# EAGLE board DBS (EAGLE 9.6.1)
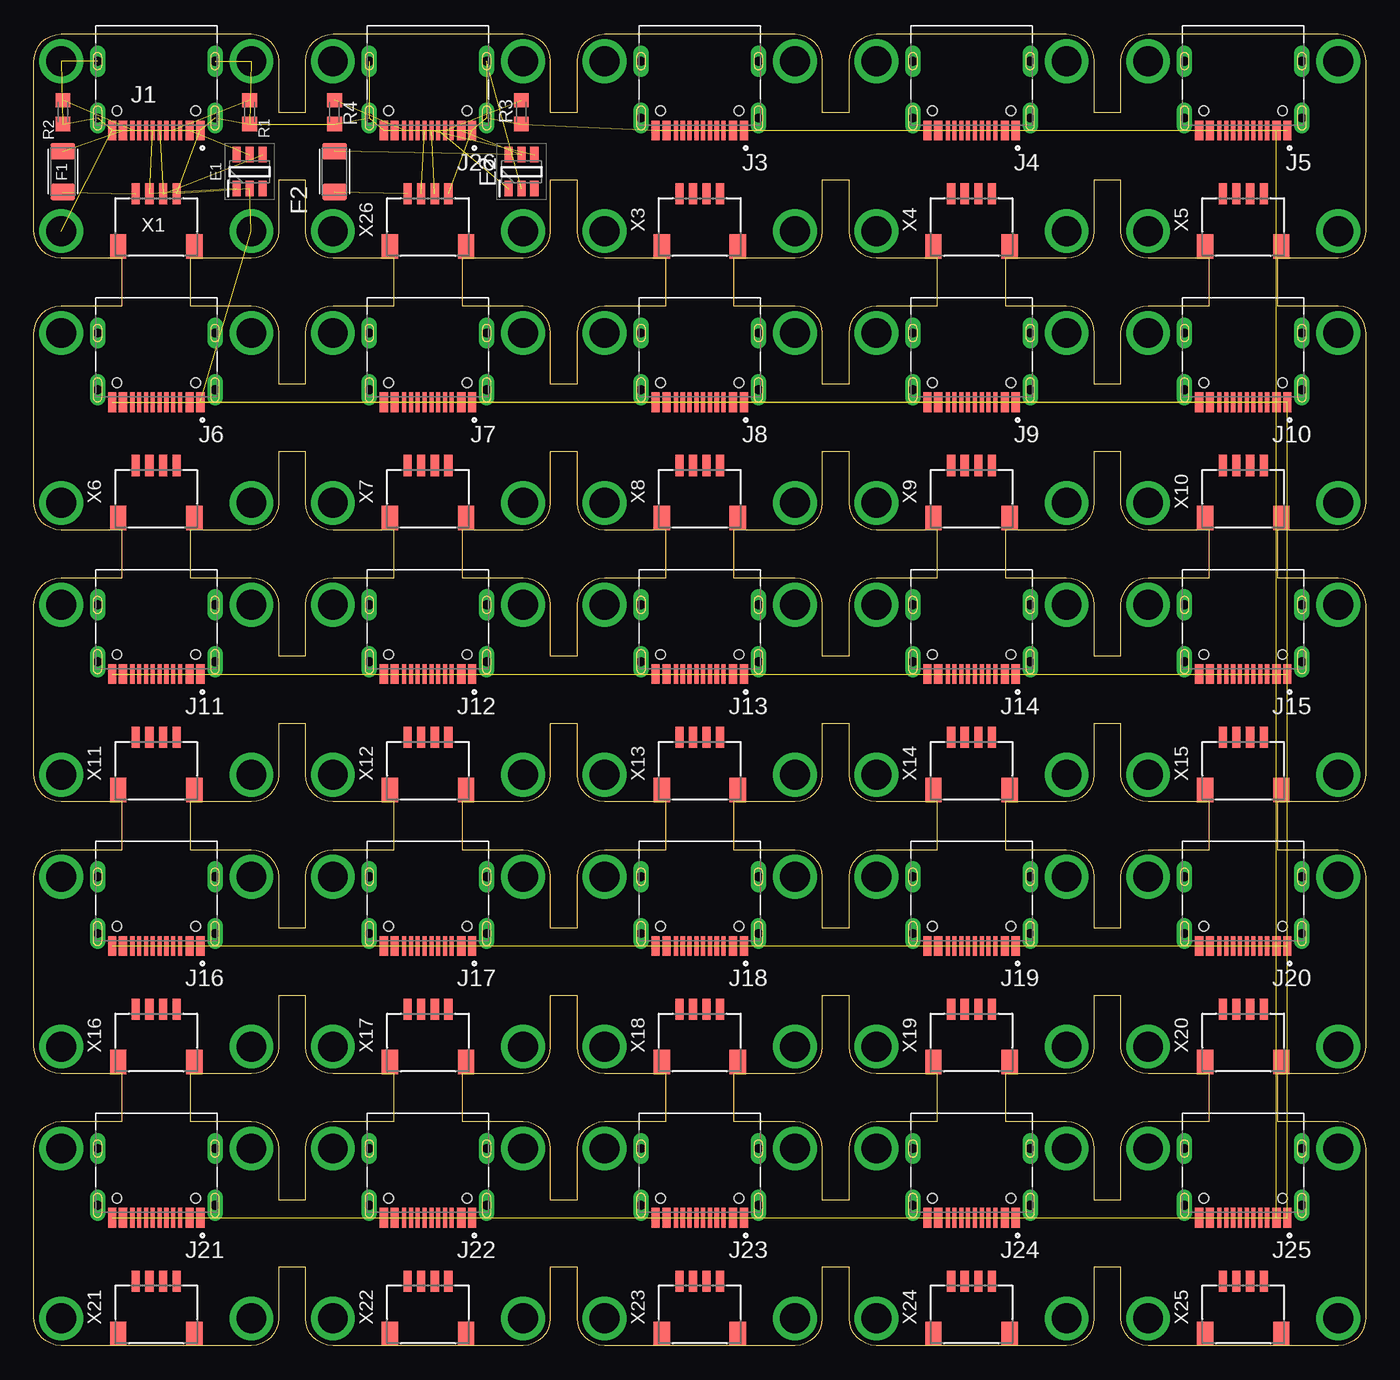
[diagram p0: board, top side]

Size 98 x 96.5 mm. Coordinates in mm from the lower left corner, seen from the top.
Outline: 91.5,16.5 96,16.5 96.4,16.46 96.78,16.34 97.12,16.16 97.41,15.91 97.66,15.62 97.84,15.28 97.96,14.9 98,14.5 98,2 97.96,1.6 97.84,1.22 97.66,0.88 97.41,0.59 97.12,0.34 96.78,0.16 96.4,0.04 96,0 82,0 81.6,0.04 81.22,0.16 80.88,0.34 80.59,0.59 80.34,0.88 80.16,1.22 80.04,1.6 80,2 80,5.75 78,5.75 78,2 77.96,1.6 77.84,1.22 77.66,0.88 77.41,0.59 77.12,0.34 76.78,0.16 76.4,0.04 76,0 62,0 61.6,0.04 61.22,0.16 60.88,0.34 60.59,0.59 60.34,0.88 60.16,1.22 60.04,1.6 60,2 60,5.75 58,5.75 58,2 57.96,1.6 57.84,1.22 57.66,0.88 57.41,0.59 57.12,0.34 56.78,0.16 56.4,0.04 56,0 42,0 41.6,0.04 41.22,0.16 40.88,0.34 40.59,0.59 40.34,0.88 40.16,1.22 40.04,1.6 40,2 40,5.75 38,5.75 38,2 37.96,1.6 37.84,1.22 37.66,0.88 37.41,0.59 37.12,0.34 36.78,0.16 36.4,0.04 36,0 22,0 21.6,0.04 21.22,0.16 20.88,0.34 20.59,0.59 20.34,0.88 20.16,1.22 20.04,1.6 20,2 20,5.75 18,5.75 18,2 17.96,1.6 17.84,1.22 17.66,0.88 17.41,0.59 17.12,0.34 16.78,0.16 16.4,0.04 16,0 2,0 1.6,0.04 1.22,0.16 0.88,0.34 0.59,0.59 0.34,0.88 0.16,1.22 0.04,1.6 0,2 0,14.5 0.04,14.9 0.16,15.28 0.34,15.62 0.59,15.91 0.88,16.16 1.22,16.34 1.6,16.46 2,16.5 6.5,16.5 6.5,20 2,20 1.6,20.04 1.22,20.16 0.88,20.34 0.59,20.59 0.34,20.88 0.16,21.22 0.04,21.6 0,22 0,34.5 0.04,34.9 0.16,35.28 0.34,35.62 0.59,35.91 0.88,36.16 1.22,36.34 1.6,36.46 2,36.5 6.5,36.5 6.5,40 2,40 1.6,40.04 1.22,40.16 0.88,40.34 0.59,40.59 0.34,40.88 0.16,41.22 0.04,41.6 0,42 0,54.5 0.04,54.9 0.16,55.28 0.34,55.62 0.59,55.91 0.88,56.16 1.22,56.34 1.6,56.46 2,56.5 6.5,56.5 6.5,60 2,60 1.6,60.04 1.22,60.16 0.88,60.34 0.59,60.59 0.34,60.88 0.16,61.22 0.04,61.6 0,62 0,74.5 0.04,74.9 0.16,75.28 0.34,75.62 0.59,75.91 0.88,76.16 1.22,76.34 1.6,76.46 2,76.5 6.5,76.5 6.5,80 2,80 1.6,80.04 1.22,80.16 0.88,80.34 0.59,80.59 0.34,80.88 0.16,81.22 0.04,81.6 0,82 0,94.5 0.04,94.9 0.16,95.28 0.34,95.62 0.59,95.91 0.88,96.16 1.22,96.34 1.6,96.46 2,96.5 16,96.5 16.4,96.46 16.78,96.34 17.12,96.16 17.41,95.91 17.66,95.62 17.84,95.28 17.96,94.9 18,94.5 18,90.75 20,90.75 20,94.5 20.04,94.9 20.16,95.28 20.34,95.62 20.59,95.91 20.88,96.16 21.22,96.34 21.6,96.46 22,96.5 36,96.5 36.4,96.46 36.78,96.34 37.12,96.16 37.41,95.91 37.66,95.62 37.84,95.28 37.96,94.9 38,94.5 38,90.75 40,90.75 40,94.5 40.04,94.9 40.16,95.28 40.34,95.62 40.59,95.91 40.88,96.16 41.22,96.34 41.6,96.46 42,96.5 56,96.5 56.4,96.46 56.78,96.34 57.12,96.16 57.41,95.91 57.66,95.62 57.84,95.28 57.96,94.9 58,94.5 58,90.75 60,90.75 60,94.5 60.04,94.9 60.16,95.28 60.34,95.62 60.59,95.91 60.88,96.16 61.22,96.34 61.6,96.46 62,96.5 76,96.5 76.4,96.46 76.78,96.34 77.12,96.16 77.41,95.91 77.66,95.62 77.84,95.28 77.96,94.9 78,94.5 78,90.75 80,90.75 80,94.5 80.04,94.9 80.16,95.28 80.34,95.62 80.59,95.91 80.88,96.16 81.22,96.34 81.6,96.46 82,96.5 96,96.5 96.4,96.46 96.78,96.34 97.12,96.16 97.41,95.91 97.66,95.62 97.84,95.28 97.96,94.9 98,94.5 98,82 97.96,81.6 97.84,81.22 97.66,80.88 97.41,80.59 97.12,80.34 96.78,80.16 96.4,80.04 96,80 91.5,80 91.5,76.5 96,76.5 96.4,76.46 96.78,76.34 97.12,76.16 97.41,75.91 97.66,75.62 97.84,75.28 97.96,74.9 98,74.5 98,62 97.96,61.6 97.84,61.22 97.66,60.88 97.41,60.59 97.12,60.34 96.78,60.16 96.4,60.04 96,60 91.5,60 91.5,56.5 96,56.5 96.4,56.46 96.78,56.34 97.12,56.16 97.41,55.91 97.66,55.62 97.84,55.28 97.96,54.9 98,54.5 98,42 97.96,41.6 97.84,41.22 97.66,40.88 97.41,40.59 97.12,40.34 96.78,40.16 96.4,40.04 96,40 91.5,40 91.5,36.5 96,36.5 96.4,36.46 96.78,36.34 97.12,36.16 97.41,35.91 97.66,35.62 97.84,35.28 97.96,34.9 98,34.5 98,22 97.96,21.6 97.84,21.22 97.66,20.88 97.41,20.59 97.12,20.34 96.78,20.16 96.4,20.04 96,20 91.5,20 91.5,16.5
Outline: 26.5,76.5 26.5,80 22,80 21.6,80.04 21.22,80.16 20.88,80.34 20.59,80.59 20.34,80.88 20.16,81.22 20.04,81.6 20,82 20,85.75 18,85.75 18,82 17.96,81.6 17.84,81.22 17.66,80.88 17.41,80.59 17.12,80.34 16.78,80.16 16.4,80.04 16,80 11.5,80 11.5,76.5 16,76.5 16.4,76.46 16.78,76.34 17.12,76.16 17.41,75.91 17.66,75.62 17.84,75.28 17.96,74.9 18,74.5 18,70.75 20,70.75 20,74.5 20.04,74.9 20.16,75.28 20.34,75.62 20.59,75.91 20.88,76.16 21.22,76.34 21.6,76.46 22,76.5 26.5,76.5
Outline: 66.5,56.5 66.5,60 62,60 61.6,60.04 61.22,60.16 60.88,60.34 60.59,60.59 60.34,60.88 60.16,61.22 60.04,61.6 60,62 60,65.75 58,65.75 58,62 57.96,61.6 57.84,61.22 57.66,60.88 57.41,60.59 57.12,60.34 56.78,60.16 56.4,60.04 56,60 51.5,60 51.5,56.5 56,56.5 56.4,56.46 56.78,56.34 57.12,56.16 57.41,55.91 57.66,55.62 57.84,55.28 57.96,54.9 58,54.5 58,50.75 60,50.75 60,54.5 60.04,54.9 60.16,55.28 60.34,55.62 60.59,55.91 60.88,56.16 61.22,56.34 61.6,56.46 62,56.5 66.5,56.5
Outline: 66.5,36.5 66.5,40 62,40 61.6,40.04 61.22,40.16 60.88,40.34 60.59,40.59 60.34,40.88 60.16,41.22 60.04,41.6 60,42 60,45.75 58,45.75 58,42 57.96,41.6 57.84,41.22 57.66,40.88 57.41,40.59 57.12,40.34 56.78,40.16 56.4,40.04 56,40 51.5,40 51.5,36.5 56,36.5 56.4,36.46 56.78,36.34 57.12,36.16 57.41,35.91 57.66,35.62 57.84,35.28 57.96,34.9 58,34.5 58,30.75 60,30.75 60,34.5 60.04,34.9 60.16,35.28 60.34,35.62 60.59,35.91 60.88,36.16 61.22,36.34 61.6,36.46 62,36.5 66.5,36.5
Outline: 46.5,36.5 46.5,40 42,40 41.6,40.04 41.22,40.16 40.88,40.34 40.59,40.59 40.34,40.88 40.16,41.22 40.04,41.6 40,42 40,45.75 38,45.75 38,42 37.96,41.6 37.84,41.22 37.66,40.88 37.41,40.59 37.12,40.34 36.78,40.16 36.4,40.04 36,40 31.5,40 31.5,36.5 36,36.5 36.4,36.46 36.78,36.34 37.12,36.16 37.41,35.91 37.66,35.62 37.84,35.28 37.96,34.9 38,34.5 38,30.75 40,30.75 40,34.5 40.04,34.9 40.16,35.28 40.34,35.62 40.59,35.91 40.88,36.16 41.22,36.34 41.6,36.46 42,36.5 46.5,36.5
Outline: 46.5,56.5 46.5,60 42,60 41.6,60.04 41.22,60.16 40.88,60.34 40.59,60.59 40.34,60.88 40.16,61.22 40.04,61.6 40,62 40,65.75 38,65.75 38,62 37.96,61.6 37.84,61.22 37.66,60.88 37.41,60.59 37.12,60.34 36.78,60.16 36.4,60.04 36,60 31.5,60 31.5,56.5 36,56.5 36.4,56.46 36.78,56.34 37.12,56.16 37.41,55.91 37.66,55.62 37.84,55.28 37.96,54.9 38,54.5 38,50.75 40,50.75 40,54.5 40.04,54.9 40.16,55.28 40.34,55.62 40.59,55.91 40.88,56.16 41.22,56.34 41.6,56.46 42,56.5 46.5,56.5
Outline: 46.5,76.5 46.5,80 42,80 41.6,80.04 41.22,80.16 40.88,80.34 40.59,80.59 40.34,80.88 40.16,81.22 40.04,81.6 40,82 40,85.75 38,85.75 38,82 37.96,81.6 37.84,81.22 37.66,80.88 37.41,80.59 37.12,80.34 36.78,80.16 36.4,80.04 36,80 31.5,80 31.5,76.5 36,76.5 36.4,76.46 36.78,76.34 37.12,76.16 37.41,75.91 37.66,75.62 37.84,75.28 37.96,74.9 38,74.5 38,70.75 40,70.75 40,74.5 40.04,74.9 40.16,75.28 40.34,75.62 40.59,75.91 40.88,76.16 41.22,76.34 41.6,76.46 42,76.5 46.5,76.5
Outline: 66.5,76.5 66.5,80 62,80 61.6,80.04 61.22,80.16 60.88,80.34 60.59,80.59 60.34,80.88 60.16,81.22 60.04,81.6 60,82 60,85.75 58,85.75 58,82 57.96,81.6 57.84,81.22 57.66,80.88 57.41,80.59 57.12,80.34 56.78,80.16 56.4,80.04 56,80 51.5,80 51.5,76.5 56,76.5 56.4,76.46 56.78,76.34 57.12,76.16 57.41,75.91 57.66,75.62 57.84,75.28 57.96,74.9 58,74.5 58,70.75 60,70.75 60,74.5 60.04,74.9 60.16,75.28 60.34,75.62 60.59,75.91 60.88,76.16 61.22,76.34 61.6,76.46 62,76.5 66.5,76.5
Outline: 86.5,76.5 86.5,80 82,80 81.6,80.04 81.22,80.16 80.88,80.34 80.59,80.59 80.34,80.88 80.16,81.22 80.04,81.6 80,82 80,85.75 78,85.75 78,82 77.96,81.6 77.84,81.22 77.66,80.88 77.41,80.59 77.12,80.34 76.78,80.16 76.4,80.04 76,80 71.5,80 71.5,76.5 76,76.5 76.4,76.46 76.78,76.34 77.12,76.16 77.41,75.91 77.66,75.62 77.84,75.28 77.96,74.9 78,74.5 78,70.75 80,70.75 80,74.5 80.04,74.9 80.16,75.28 80.34,75.62 80.59,75.91 80.88,76.16 81.22,76.34 81.6,76.46 82,76.5 86.5,76.5
Outline: 86.5,56.5 86.5,60 82,60 81.6,60.04 81.22,60.16 80.88,60.34 80.59,60.59 80.34,60.88 80.16,61.22 80.04,61.6 80,62 80,65.75 78,65.75 78,62 77.96,61.6 77.84,61.22 77.66,60.88 77.41,60.59 77.12,60.34 76.78,60.16 76.4,60.04 76,60 71.5,60 71.5,56.5 76,56.5 76.4,56.46 76.78,56.34 77.12,56.16 77.41,55.91 77.66,55.62 77.84,55.28 77.96,54.9 78,54.5 78,50.75 80,50.75 80,54.5 80.04,54.9 80.16,55.28 80.34,55.62 80.59,55.91 80.88,56.16 81.22,56.34 81.6,56.46 82,56.5 86.5,56.5
Outline: 86.5,36.5 86.5,40 82,40 81.6,40.04 81.22,40.16 80.88,40.34 80.59,40.59 80.34,40.88 80.16,41.22 80.04,41.6 80,42 80,45.75 78,45.75 78,42 77.96,41.6 77.84,41.22 77.66,40.88 77.41,40.59 77.12,40.34 76.78,40.16 76.4,40.04 76,40 71.5,40 71.5,36.5 76,36.5 76.4,36.46 76.78,36.34 77.12,36.16 77.41,35.91 77.66,35.62 77.84,35.28 77.96,34.9 78,34.5 78,30.75 80,30.75 80,34.5 80.04,34.9 80.16,35.28 80.34,35.62 80.59,35.91 80.88,36.16 81.22,36.34 81.6,36.46 82,36.5 86.5,36.5
Outline: 86.5,16.5 86.5,20 82,20 81.6,20.04 81.22,20.16 80.88,20.34 80.59,20.59 80.34,20.88 80.16,21.22 80.04,21.6 80,22 80,25.75 78,25.75 78,22 77.96,21.6 77.84,21.22 77.66,20.88 77.41,20.59 77.12,20.34 76.78,20.16 76.4,20.04 76,20 71.5,20 71.5,16.5 76,16.5 76.4,16.46 76.78,16.34 77.12,16.16 77.41,15.91 77.66,15.62 77.84,15.28 77.96,14.9 78,14.5 78,10.75 80,10.75 80,14.5 80.04,14.9 80.16,15.28 80.34,15.62 80.59,15.91 80.88,16.16 81.22,16.34 81.6,16.46 82,16.5 86.5,16.5
Outline: 66.5,16.5 66.5,20 62,20 61.6,20.04 61.22,20.16 60.88,20.34 60.59,20.59 60.34,20.88 60.16,21.22 60.04,21.6 60,22 60,25.75 58,25.75 58,22 57.96,21.6 57.84,21.22 57.66,20.88 57.41,20.59 57.12,20.34 56.78,20.16 56.4,20.04 56,20 51.5,20 51.5,16.5 56,16.5 56.4,16.46 56.78,16.34 57.12,16.16 57.41,15.91 57.66,15.62 57.84,15.28 57.96,14.9 58,14.5 58,10.75 60,10.75 60,14.5 60.04,14.9 60.16,15.28 60.34,15.62 60.59,15.91 60.88,16.16 61.22,16.34 61.6,16.46 62,16.5 66.5,16.5
Outline: 46.5,16.5 46.5,20 42,20 41.6,20.04 41.22,20.16 40.88,20.34 40.59,20.59 40.34,20.88 40.16,21.22 40.04,21.6 40,22 40,25.75 38,25.75 38,22 37.96,21.6 37.84,21.22 37.66,20.88 37.41,20.59 37.12,20.34 36.78,20.16 36.4,20.04 36,20 31.5,20 31.5,16.5 36,16.5 36.4,16.46 36.78,16.34 37.12,16.16 37.41,15.91 37.66,15.62 37.84,15.28 37.96,14.9 38,14.5 38,10.75 40,10.75 40,14.5 40.04,14.9 40.16,15.28 40.34,15.62 40.59,15.91 40.88,16.16 41.22,16.34 41.6,16.46 42,16.5 46.5,16.5
Outline: 26.5,16.5 26.5,20 22,20 21.6,20.04 21.22,20.16 20.88,20.34 20.59,20.59 20.34,20.88 20.16,21.22 20.04,21.6 20,22 20,25.75 18,25.75 18,22 17.96,21.6 17.84,21.22 17.66,20.88 17.41,20.59 17.12,20.34 16.78,20.16 16.4,20.04 16,20 11.5,20 11.5,16.5 16,16.5 16.4,16.46 16.78,16.34 17.12,16.16 17.41,15.91 17.66,15.62 17.84,15.28 17.96,14.9 18,14.5 18,10.75 20,10.75 20,14.5 20.04,14.9 20.16,15.28 20.34,15.62 20.59,15.91 20.88,16.16 21.22,16.34 21.6,16.46 22,16.5 26.5,16.5
Outline: 26.5,36.5 26.5,40 22,40 21.6,40.04 21.22,40.16 20.88,40.34 20.59,40.59 20.34,40.88 20.16,41.22 20.04,41.6 20,42 20,45.75 18,45.75 18,42 17.96,41.6 17.84,41.22 17.66,40.88 17.41,40.59 17.12,40.34 16.78,40.16 16.4,40.04 16,40 11.5,40 11.5,36.5 16,36.5 16.4,36.46 16.78,36.34 17.12,36.16 17.41,35.91 17.66,35.62 17.84,35.28 17.96,34.9 18,34.5 18,30.75 20,30.75 20,34.5 20.04,34.9 20.16,35.28 20.34,35.62 20.59,35.91 20.88,36.16 21.22,36.34 21.6,36.46 22,36.5 26.5,36.5
Outline: 26.5,56.5 26.5,60 22,60 21.6,60.04 21.22,60.16 20.88,60.34 20.59,60.59 20.34,60.88 20.16,61.22 20.04,61.6 20,62 20,65.75 18,65.75 18,62 17.96,61.6 17.84,61.22 17.66,60.88 17.41,60.59 17.12,60.34 16.78,60.16 16.4,60.04 16,60 11.5,60 11.5,56.5 16,56.5 16.4,56.46 16.78,56.34 17.12,56.16 17.41,55.91 17.66,55.62 17.84,55.28 17.96,54.9 18,54.5 18,50.75 20,50.75 20,54.5 20.04,54.9 20.16,55.28 20.34,55.62 20.59,55.91 20.88,56.16 21.22,56.34 21.6,56.46 22,56.5 26.5,56.5
Copper layers (1*16): Top 0.035mm / dielectric 1.5mm / Bottom 0.035mm
Design rules "default": minimum track width 6mil, minimum drill 0.35mm, track to track 6mil, track to pad 6mil, pad to pad 6mil, via to via 6mil, smd to smd 6mil, copper to edge 40mil, drill to drill 6mil, minimum pad ring 10mil, minimum via ring 8mil, stop-mask expansion 4mil, vias tented up to drill 0mil, thermal gap 10mil

## Footprints (pad centres in the part's own frame; a part is rotated, then mirrored left to right if it is on the bottom)
SOT95P280X145-6N = smd 1.15 x 0.6: 1 -1.25,0.95; 2 -1.25,0; 3 -1.25,-0.95; 4 1.25,-0.95; 5 1.25,0; 6 1.25,0.95
RESC3216X125N = smd 1.2 x 1.82: 1 -1.505,0; 2 1.505,0
HRO_TYPE-C-31-M-12 = smd 0.6 x 1.45: A1B12 -3.25,5.095; A4B9 -2.45,5.095; B1A12 3.25,5.095; B4A9 2.45,5.095 | smd 0.3 x 1.45: A5 -1.25,5.095; A6 -0.25,5.095; A7 0.25,5.095; A8 1.25,5.095; B5 1.75,5.095; B6 0.75,5.095; B7 -0.75,5.095; B8 -1.75,5.095 | drill 0.65 pad 1.05 long: S1 -4.32,4.18; S2 4.32,4.18; S3 -4.32,0; S4 4.32,0 | hole 0.7: -2.89,3.65; 2.89,3.65
R0603 = smd 1.05 x 1.08: 1 -0.875,0; 2 0.875,0
SM04B-SRSS-TB = smd 0.6 x 1.55: 1 1.5,0; 2 0.5,0; 3 -0.5,0; 4 -1.5,0 | smd 1.2 x 1.8: M1 2.8,3.875; M2 -2.8,3.875

## Placement (x,y rotation side)
E1  SRV05-4.TCT  [SOT95P280X145-6N]  15.87,86.37 90 top
E2  SRV05-4.TCT  [SOT95P280X145-6N]  35.87,86.37 90 top
F1  500mA  [RESC3216X125N]  2.12,86.37 90 top
F2  500mA  [RESC3216X125N]  22.12,86.37 90 top
J1  TYPE-C-31-M-12  [HRO_TYPE-C-31-M-12]  9,94.5 180 top
J3  TYPE-C-31-M-12  [HRO_TYPE-C-31-M-12]  49,94.5 180 top
J4  TYPE-C-31-M-12  [HRO_TYPE-C-31-M-12]  69,94.5 180 top
J5  TYPE-C-31-M-12  [HRO_TYPE-C-31-M-12]  89,94.5 180 top
J6  TYPE-C-31-M-12  [HRO_TYPE-C-31-M-12]  9,74.5 180 top
J7  TYPE-C-31-M-12  [HRO_TYPE-C-31-M-12]  29,74.5 180 top
J8  TYPE-C-31-M-12  [HRO_TYPE-C-31-M-12]  49,74.5 180 top
J9  TYPE-C-31-M-12  [HRO_TYPE-C-31-M-12]  69,74.5 180 top
J10  TYPE-C-31-M-12  [HRO_TYPE-C-31-M-12]  89,74.5 180 top
J11  TYPE-C-31-M-12  [HRO_TYPE-C-31-M-12]  9,54.5 180 top
J12  TYPE-C-31-M-12  [HRO_TYPE-C-31-M-12]  29,54.5 180 top
J13  TYPE-C-31-M-12  [HRO_TYPE-C-31-M-12]  49,54.5 180 top
J14  TYPE-C-31-M-12  [HRO_TYPE-C-31-M-12]  69,54.5 180 top
J15  TYPE-C-31-M-12  [HRO_TYPE-C-31-M-12]  89,54.5 180 top
J16  TYPE-C-31-M-12  [HRO_TYPE-C-31-M-12]  9,34.5 180 top
J17  TYPE-C-31-M-12  [HRO_TYPE-C-31-M-12]  29,34.5 180 top
J18  TYPE-C-31-M-12  [HRO_TYPE-C-31-M-12]  49,34.5 180 top
J19  TYPE-C-31-M-12  [HRO_TYPE-C-31-M-12]  69,34.5 180 top
J20  TYPE-C-31-M-12  [HRO_TYPE-C-31-M-12]  89,34.5 180 top
J21  TYPE-C-31-M-12  [HRO_TYPE-C-31-M-12]  9,14.5 180 top
J22  TYPE-C-31-M-12  [HRO_TYPE-C-31-M-12]  29,14.5 180 top
J23  TYPE-C-31-M-12  [HRO_TYPE-C-31-M-12]  49,14.5 180 top
J24  TYPE-C-31-M-12  [HRO_TYPE-C-31-M-12]  69,14.5 180 top
J25  TYPE-C-31-M-12  [HRO_TYPE-C-31-M-12]  89,14.5 180 top
J26  TYPE-C-31-M-12  [HRO_TYPE-C-31-M-12]  29,94.5 180 top
R1  5.1k  [R0603]  15.87,90.75 90 top
R2  5.1k  [R0603]  2.12,90.75 270 top
R3  5.1k  [R0603]  35.87,90.75 90 top
R4  5.1k  [R0603]  22.12,90.75 270 top
X1  SM04B-SRSS-TB  [SM04B-SRSS-TB]  9,84.75 180 top
X3  SM04B-SRSS-TB  [SM04B-SRSS-TB]  49,84.75 180 top
X4  SM04B-SRSS-TB  [SM04B-SRSS-TB]  69,84.75 180 top
X5  SM04B-SRSS-TB  [SM04B-SRSS-TB]  89,84.75 180 top
X6  SM04B-SRSS-TB  [SM04B-SRSS-TB]  9,64.75 180 top
X7  SM04B-SRSS-TB  [SM04B-SRSS-TB]  29,64.75 180 top
X8  SM04B-SRSS-TB  [SM04B-SRSS-TB]  49,64.75 180 top
X9  SM04B-SRSS-TB  [SM04B-SRSS-TB]  69,64.75 180 top
X10  SM04B-SRSS-TB  [SM04B-SRSS-TB]  89,64.75 180 top
X11  SM04B-SRSS-TB  [SM04B-SRSS-TB]  9,44.75 180 top
X12  SM04B-SRSS-TB  [SM04B-SRSS-TB]  29,44.75 180 top
X13  SM04B-SRSS-TB  [SM04B-SRSS-TB]  49,44.75 180 top
X14  SM04B-SRSS-TB  [SM04B-SRSS-TB]  69,44.75 180 top
X15  SM04B-SRSS-TB  [SM04B-SRSS-TB]  89,44.75 180 top
X16  SM04B-SRSS-TB  [SM04B-SRSS-TB]  9,24.75 180 top
X17  SM04B-SRSS-TB  [SM04B-SRSS-TB]  29,24.75 180 top
X18  SM04B-SRSS-TB  [SM04B-SRSS-TB]  49,24.75 180 top
X19  SM04B-SRSS-TB  [SM04B-SRSS-TB]  69,24.75 180 top
X20  SM04B-SRSS-TB  [SM04B-SRSS-TB]  89,24.75 180 top
X21  SM04B-SRSS-TB  [SM04B-SRSS-TB]  9,4.75 180 top
X22  SM04B-SRSS-TB  [SM04B-SRSS-TB]  29,4.75 180 top
X23  SM04B-SRSS-TB  [SM04B-SRSS-TB]  49,4.75 180 top
X24  SM04B-SRSS-TB  [SM04B-SRSS-TB]  69,4.75 180 top
X25  SM04B-SRSS-TB  [SM04B-SRSS-TB]  89,4.75 180 top
X26  SM04B-SRSS-TB  [SM04B-SRSS-TB]  29,84.75 180 top

## Library data of the parts
E1 E2 = SRV05-4.TCT; AVAILABILITY: In Stock; DESCRIPTION: 17.5V Clamp 12A (8/20µs) Ipp Tvs Diode Surface Mount SOT-23-6; MF: Semtech; MP: SRV05-4.TC; PACKAGE: SOT-23-6 Semtech; PRICE: None; PURCHASE-URL: https://pricing.snapeda.com/search/part/SRV05-4.TC/?ref=eda
F1 F2 = fuse; AVAILABILITY: In Stock; DESCRIPTION: 1206 SMT PPTC | 0.75 Ih | 16V; MF: Bel Fuse; MP: 0ZCJ0075AF2E; PACKAGE: 1206 Bel Fuse; PRICE: None; PURCHASE-URL: https://pricing.snapeda.com/search/part/0ZCJ0075AF2E/?ref=eda
J1 J3-J26 = TYPE-C-31-M-12; AVAILABILITY: Unavailable; DESCRIPTION: USB Connectors 24 Receptacle 1 8.94*7.3mm RoHS; MF: HRO Electronics Co., Ltd.; MP: TYPE-C-31-M-12; PACKAGE: Package; PRICE: None
R1-R4 = Components
X1 X3-X26 = con-JST SH

## Nets
DN1: E1.1 J1.A7 J1.B7 X1.2
DN2: E2.1 J26.A7 J26.B7 X26.2
DP1: E1.4 J1.A6 J1.B6 X1.3
DP2: E2.4 J26.A6 J26.B6 X26.3
GND: E1.2 E2.2 J1.A1B12 J1.B1A12 J1.S1 J1.S2 J1.S3 J1.S4 J3.A1B12 J3.B1A12 J4.A1B12 J4.B1A12 J5.A1B12 J5.B1A12 J6.A1B12 J6.B1A12 J7.A1B12 J7.B1A12 J8.A1B12 J8.B1A12 J9.A1B12 J9.B1A12 J10.A1B12 J10.B1A12 J11.A1B12 J11.B1A12 J12.A1B12 J12.B1A12 J13.A1B12 J13.B1A12 J14.A1B12 J14.B1A12 J15.A1B12 J15.B1A12 J16.A1B12 J16.B1A12 J17.A1B12 J17.B1A12 J18.A1B12 J18.B1A12 J19.A1B12 J19.B1A12 J20.A1B12 J20.B1A12 J21.A1B12 J21.B1A12 J22.A1B12 J22.B1A12 J23.A1B12 J23.B1A12 J24.A1B12 J24.B1A12 J25.A1B12 J25.B1A12 J26.A1B12 J26.B1A12 J26.S1 J26.S2 J26.S3 J26.S4 R1.1 R2.2 R3.1 R4.2 X1.4 X26.4
N$1: J1.A5 R1.2
N$2: J1.B5 R2.1
N$3: E2.5 F2.2 J26.A4B9 J26.B4A9
N$4: F2.1 X26.1
N$101: E1.5 F1.2 J1.A4B9 J1.B4A9
N$102: J26.A5 R3.2
N$103: F1.1 X1.1
N$104: J26.B5 R4.1
VBUS: J3.A4B9 J3.B4A9 J4.A4B9 J4.B4A9 J5.A4B9 J5.B4A9 J6.A4B9 J6.B4A9 J7.A4B9 J7.B4A9 J8.A4B9 J8.B4A9 J9.A4B9 J9.B4A9 J10.A4B9 J10.B4A9 J11.A4B9 J11.B4A9 J12.A4B9 J12.B4A9 J13.A4B9 J13.B4A9 J14.A4B9 J14.B4A9 J15.A4B9 J15.B4A9 J16.A4B9 J16.B4A9 J17.A4B9 J17.B4A9 J18.A4B9 J18.B4A9 J19.A4B9 J19.B4A9 J20.A4B9 J20.B4A9 J21.A4B9 J21.B4A9 J22.A4B9 J22.B4A9 J23.A4B9 J23.B4A9 J24.A4B9 J24.B4A9 J25.A4B9 J25.B4A9

## Tracks (layer width: path | path; a pad name or v marks a point on that pad's centre or on a via)
DN1  (3 unrouted)
DN2  (3 unrouted)
DP1  (3 unrouted)
DP2  (3 unrouted)
GND  (via drill 2.2)  (69 unrouted)
  other vias: 2,94.5 16,94.5 16,82 2,82
N$1  (1 unrouted)
N$2  (1 unrouted)
N$3  (3 unrouted)
N$4  (1 unrouted)
N$5  (via drill 2.2)
  other vias: 2,74.5
N$6  (via drill 2.2)
  other vias: 16,74.5
N$7  (via drill 2.2)
  other vias: 2,62
N$8  (via drill 2.2)
  other vias: 16,62
N$9  (via drill 2.2)
  other vias: 2,54.5
N$10  (via drill 2.2)
  other vias: 16,54.5
N$11  (via drill 2.2)
  other vias: 2,42
N$12  (via drill 2.2)
  other vias: 16,42
N$13  (via drill 2.2)
  other vias: 2,34.5
N$14  (via drill 2.2)
  other vias: 16,34.5
N$15  (via drill 2.2)
  other vias: 2,22
N$16  (via drill 2.2)
  other vias: 16,22
N$17  (via drill 2.2)
  other vias: 2,14.5
N$18  (via drill 2.2)
  other vias: 16,14.5
N$19  (via drill 2.2)
  other vias: 2,2
N$20  (via drill 2.2)
  other vias: 16,2
N$21  (via drill 2.2)
  other vias: 22,14.5
N$22  (via drill 2.2)
  other vias: 36,14.5
N$23  (via drill 2.2)
  other vias: 22,2
N$24  (via drill 2.2)
  other vias: 36,2
N$25  (via drill 2.2)
  other vias: 22,34.5
N$26  (via drill 2.2)
  other vias: 36,34.5
N$27  (via drill 2.2)
  other vias: 22,22
N$28  (via drill 2.2)
  other vias: 36,22
N$29  (via drill 2.2)
  other vias: 22,54.5
N$30  (via drill 2.2)
  other vias: 36,54.5
N$31  (via drill 2.2)
  other vias: 22,42
N$32  (via drill 2.2)
  other vias: 36,42
N$33  (via drill 2.2)
  other vias: 22,74.5
N$34  (via drill 2.2)
  other vias: 36,74.5
N$35  (via drill 2.2)
  other vias: 22,62
N$36  (via drill 2.2)
  other vias: 36,62
N$37  (via drill 2.2)
  other vias: 22,94.5
N$38  (via drill 2.2)
  other vias: 36,94.5
N$39  (via drill 2.2)
  other vias: 22,82
N$40  (via drill 2.2)
  other vias: 36,82
N$41  (via drill 2.2)
  other vias: 42,94.5
N$42  (via drill 2.2)
  other vias: 56,94.5
N$43  (via drill 2.2)
  other vias: 42,82
N$44  (via drill 2.2)
  other vias: 56,82
N$45  (via drill 2.2)
  other vias: 42,74.5
N$46  (via drill 2.2)
  other vias: 56,74.5
N$47  (via drill 2.2)
  other vias: 42,62
N$48  (via drill 2.2)
  other vias: 56,62
N$49  (via drill 2.2)
  other vias: 42,54.5
N$50  (via drill 2.2)
  other vias: 56,54.5
N$51  (via drill 2.2)
  other vias: 42,42
N$52  (via drill 2.2)
  other vias: 56,42
N$53  (via drill 2.2)
  other vias: 42,34.5
N$54  (via drill 2.2)
  other vias: 56,34.5
N$55  (via drill 2.2)
  other vias: 42,22
N$56  (via drill 2.2)
  other vias: 56,22
N$57  (via drill 2.2)
  other vias: 42,14.5
N$58  (via drill 2.2)
  other vias: 56,14.5
N$59  (via drill 2.2)
  other vias: 42,2
N$60  (via drill 2.2)
  other vias: 56,2
N$61  (via drill 2.2)
  other vias: 62,14.5
N$62  (via drill 2.2)
  other vias: 76,14.5
N$63  (via drill 2.2)
  other vias: 62,2
N$64  (via drill 2.2)
  other vias: 76,2
N$65  (via drill 2.2)
  other vias: 82,14.5
N$66  (via drill 2.2)
  other vias: 96,14.5
N$67  (via drill 2.2)
  other vias: 82,2
N$68  (via drill 2.2)
  other vias: 96,2
N$69  (via drill 2.2)
  other vias: 82,34.5
N$70  (via drill 2.2)
  other vias: 96,34.5
N$71  (via drill 2.2)
  other vias: 82,22
N$72  (via drill 2.2)
  other vias: 96,22
N$73  (via drill 2.2)
  other vias: 62,34.5
N$74  (via drill 2.2)
  other vias: 76,34.5
N$75  (via drill 2.2)
  other vias: 62,22
N$76  (via drill 2.2)
  other vias: 76,22
N$77  (via drill 2.2)
  other vias: 62,54.5
N$78  (via drill 2.2)
  other vias: 76,54.5
N$79  (via drill 2.2)
  other vias: 62,42
N$80  (via drill 2.2)
  other vias: 76,42
N$81  (via drill 2.2)
  other vias: 62,74.5
N$82  (via drill 2.2)
  other vias: 76,74.5
N$83  (via drill 2.2)
  other vias: 62,62
N$84  (via drill 2.2)
  other vias: 76,62
N$85  (via drill 2.2)
  other vias: 62,94.5
N$86  (via drill 2.2)
  other vias: 76,94.5
N$87  (via drill 2.2)
  other vias: 62,82
N$88  (via drill 2.2)
  other vias: 76,82
N$89  (via drill 2.2)
  other vias: 82,94.5
N$90  (via drill 2.2)
  other vias: 96,94.5
N$91  (via drill 2.2)
  other vias: 82,82
N$92  (via drill 2.2)
  other vias: 96,82
N$93  (via drill 2.2)
  other vias: 82,74.5
N$94  (via drill 2.2)
  other vias: 96,74.5
N$95  (via drill 2.2)
  other vias: 82,62
N$96  (via drill 2.2)
  other vias: 96,62
N$97  (via drill 2.2)
  other vias: 82,54.5
N$98  (via drill 2.2)
  other vias: 96,54.5
N$99  (via drill 2.2)
  other vias: 82,42
N$100  (via drill 2.2)
  other vias: 96,42
N$101  (3 unrouted)
N$102  (1 unrouted)
N$103  (1 unrouted)
N$104  (1 unrouted)
VBUS  (45 unrouted)